# Altium PCB PCB_layer1.PcbDoc
Units mm, origin at the board's own origin, x right, y up, seen from the top; angles counter-clockwise.
Board outline 140.34 x 105.41 mm, 2 copper layers (Top Layer, Bottom Layer); 81 components, 0 nets, 416 pads, 142 vias.
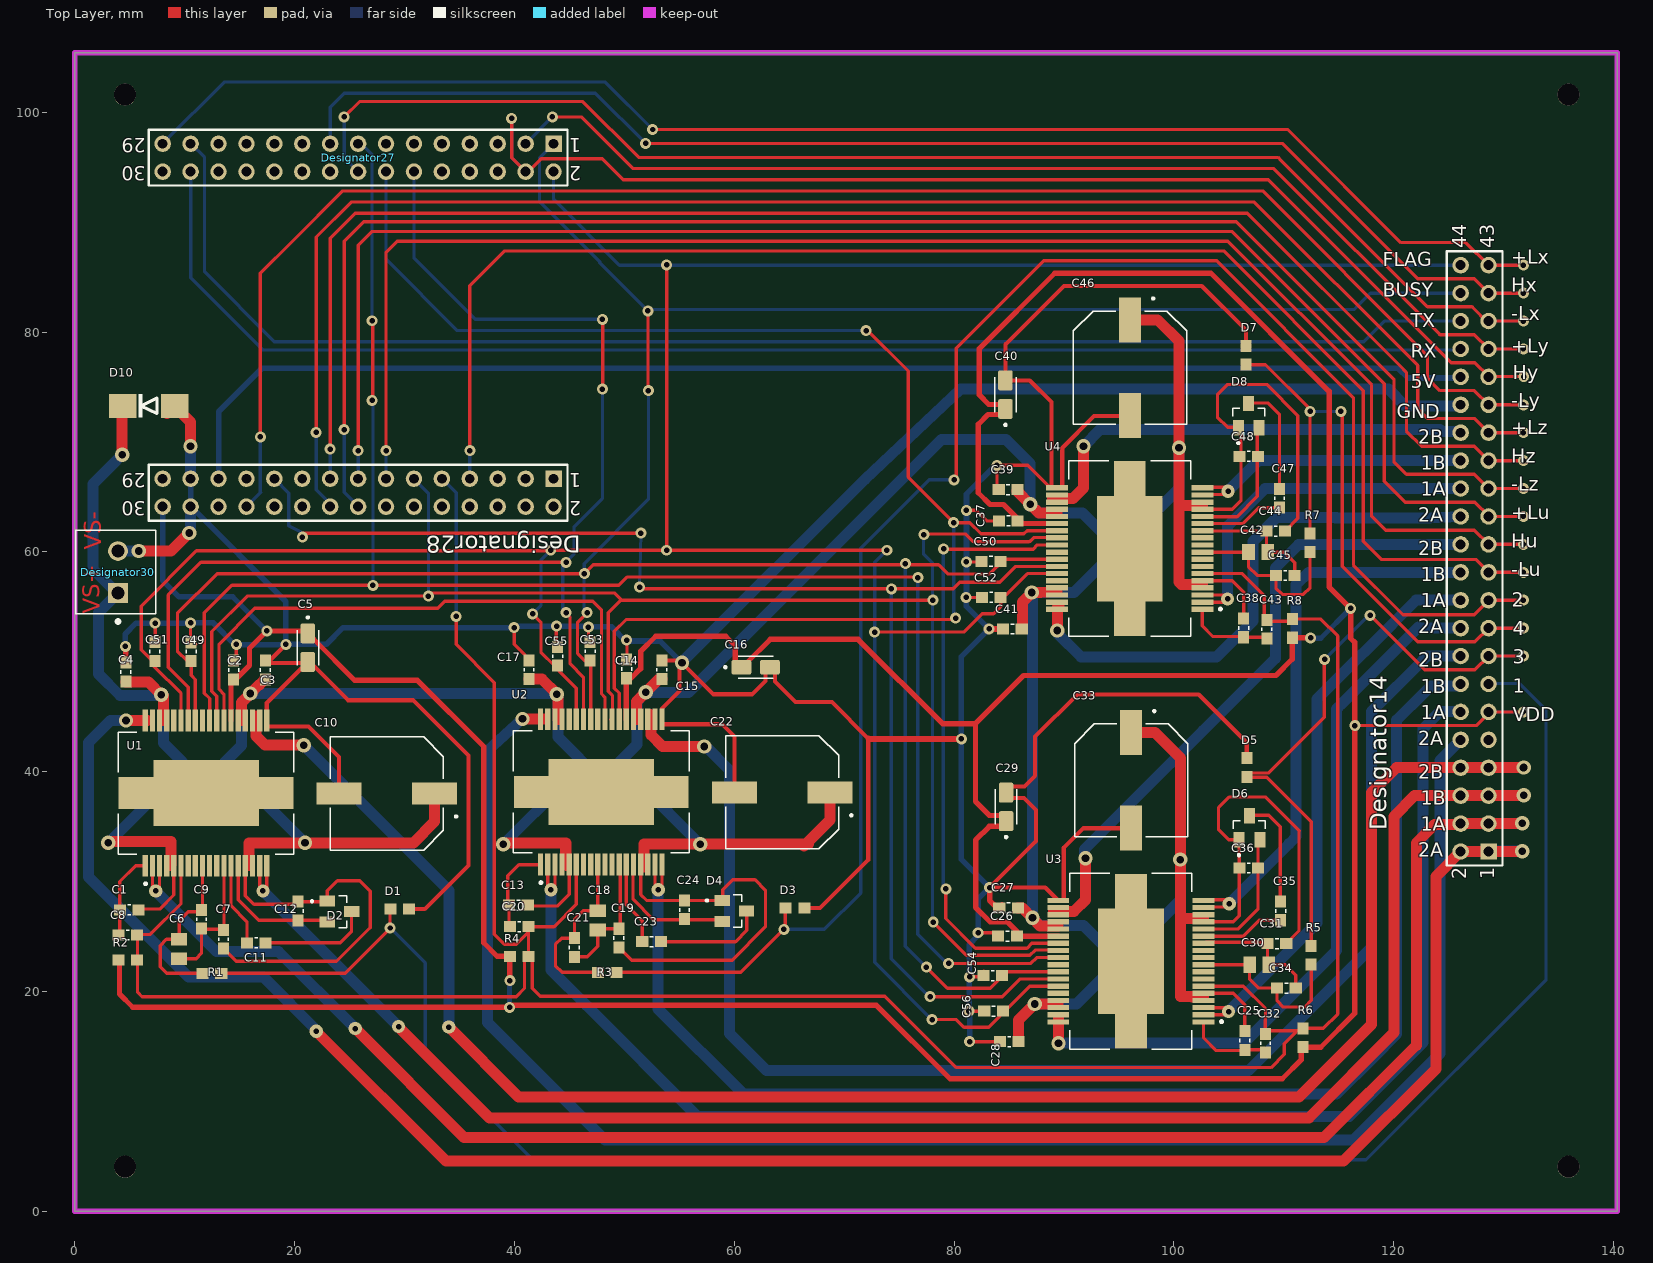
[diagram p0: Top Layer view]
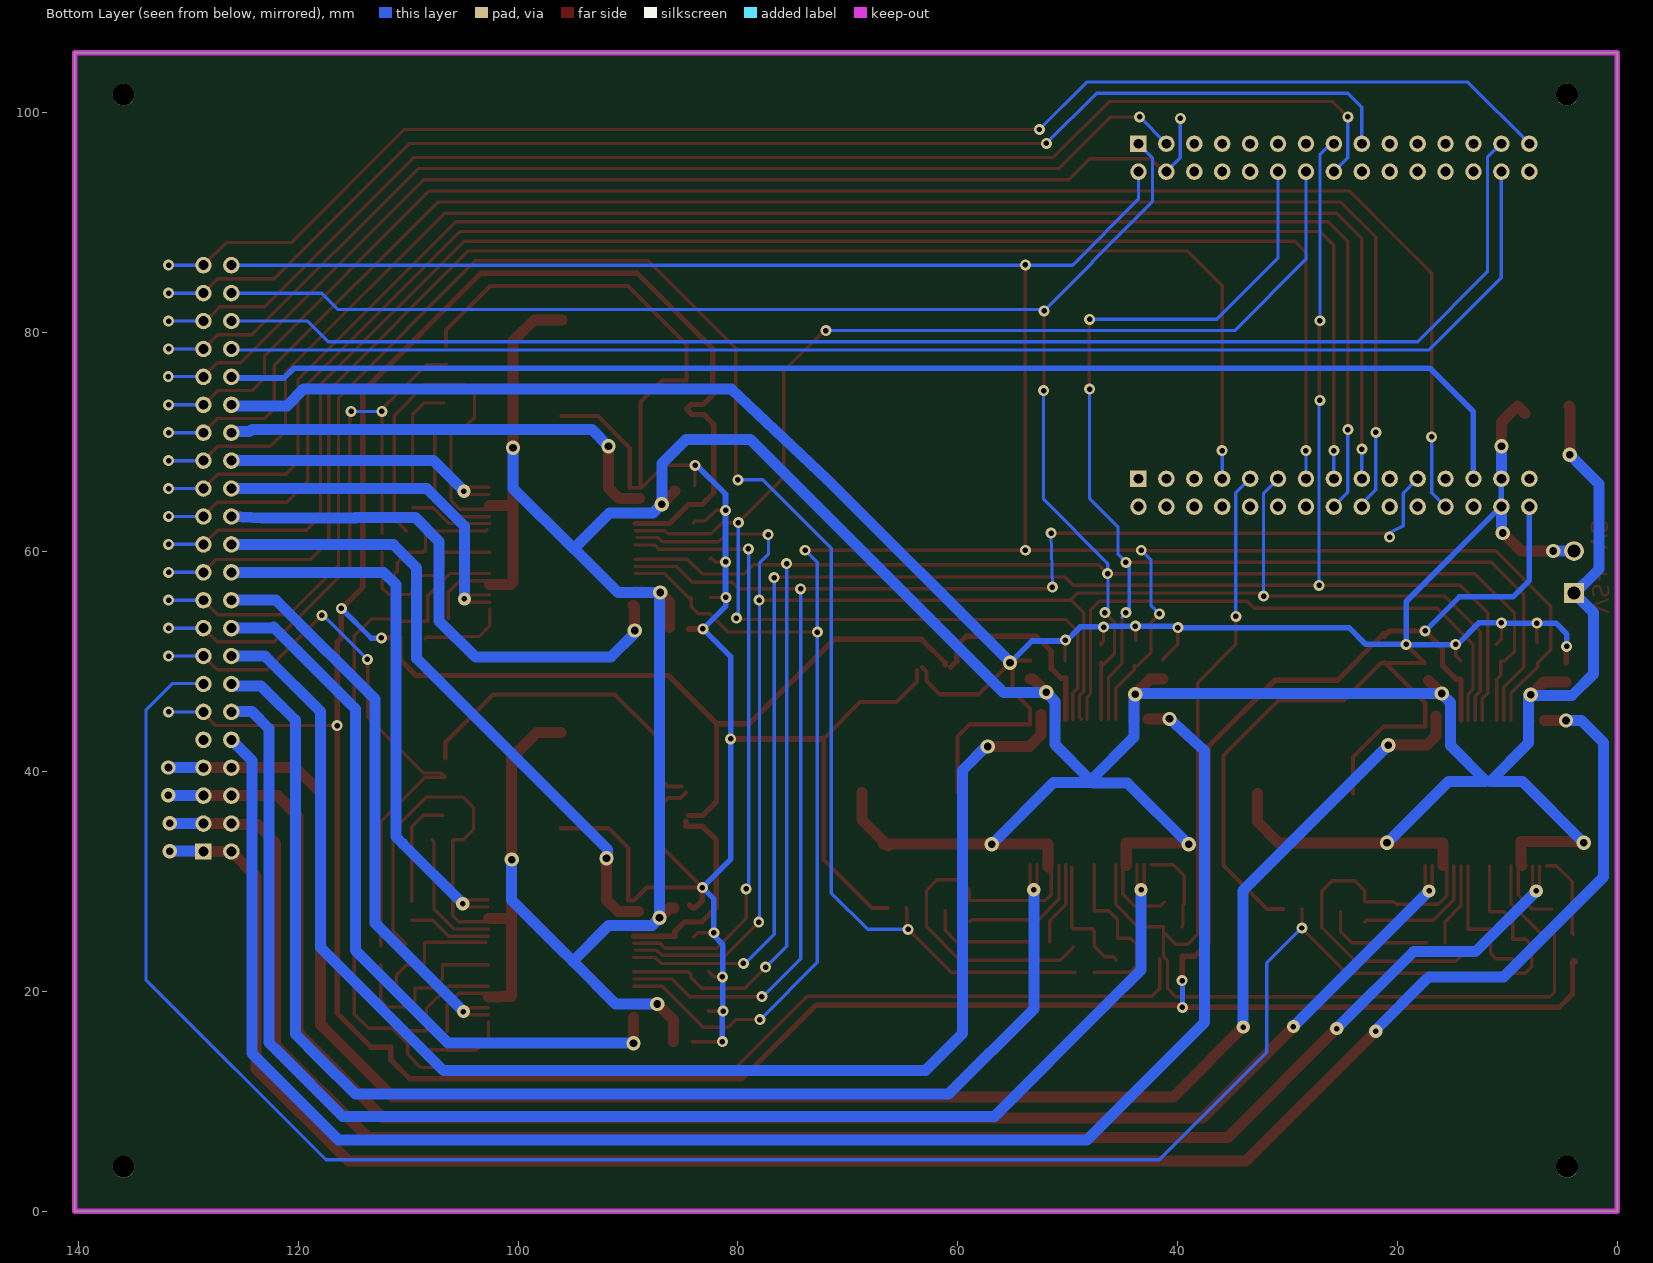
[diagram p1: Bottom Layer view, seen from below]

## Layer stack, top to bottom
Top Solder: solder mask 0.0102, Solder Resist, Dk 3.5
Top Layer: signal copper 0.0356
Dielectric 1: dielectric 0.32, FR-4, Dk 4.8
Bottom Layer: signal copper 0.0356
Bottom Solder: solder mask 0.0102, Solder Resist, Dk 3.5

## Board outline
0,0 140.335,0 140.335,105.41 0,105.41

## Design rules (kind name [scope] priority, off if disabled: settings)
Clearance [All] p1: gap=0.254 ignorepadtopadclearanceinfootprint=FALSE except(0: Arc-Hole Track-Hole SMDPad-Hole THPad-Hole Via-Hole Fill-Hole Poly-Hole Region-Hole Text-Hole)
PolygonConnect [All] p1: connectstyle=Relief reliefconductorwidth=0.254 reliefentries=4 polygonreliefangle="90 Angle" airgapwidth=0.254
RoutingVias [All] p1: holewidth=0.711 width=1.27 viastyle="Through Hole" minholewidth=0.5 minwidth=1 maxholewidth=0.711 maxwidth=1.3
ShortCircuit [All] p1: allowed=TRUE
SolderMaskExpansion [All] p1: expansion=0.102
Width [All] p1: maxlimit=1 minlimit=0.254 preferedwidth=0.254
29 further rules are at their usual default settings.

## Components (designator, comment, footprint, x,y, rotation, side; value= is the part's Value field where it differs from the comment)
C1 "100nF" CAPC1608X90 4.953,27.432 r180 top
C2 "100nF" CAPC1608X90 14.453,49.251 r90 top
C3 "100nF" CAPC1608X90 17.348,49.251 r90 top
C4 "100nF" CAPC1608X90 4.648,49.073 r90 top
C5 "47uF" CAPMP3216X180N 21.209,51.283 r270 top
C6 "10uF" CAPC2012X145N 9.5,23.876 r270 top
C7 "100nF" CAPC1608X90 13.538,24.765 r90 top
C8 "1nF" CAPC1608X90 4.826,25.146 r180 top
C9 "100nF" CAPC1608X90 11.532,26.58 r270 top
C10 "100uF" CAP_EEEFK1J101P 28.397,38.024 r180 top
C11 "10nF" CAPC1608X90 16.522,24.435 r0 top
C12 "220nF" CAPC1608X90 20.32,27.33 r270 top
C13 "100nF" CAPC1608X90 40.361,27.864 r180 top
C14 "100nF" CAPC1608X90 50.212,49.352 r90 top
C15 "100nF" CAPC1608X90 53.416,49.276 r90 top
C16 "47uF" CAPMP3216X180N 61.947,49.505 r0 top
C17 "100nF" CAPC1608X90 41.326,49.276 r90 top
C18 "10uF" CAPC2012X145N 47.585,26.476 r270 top
C19 "100nF" CAPC1608X90 49.501,24.867 r90 top
C20 "1nF" CAPC1608X90 40.437,25.908 r180 top
C21 "100nF" CAPC1608X90 45.463,24.008 r270 top
C22 "100uF" CAP_EEEFK1J101P 64.36,38.125 r180 top
C23 "10nF" CAPC1608X90 52.485,24.536 r0 top
C24 "220nF" CAPC1608X90 55.47,27.432 r270 top
C25 "100nF" CAPC1608X90 106.451,15.545 r270 top
C26 "100nF" CAPC1608X90 84.861,25.039 r180 top
C27 "100nF" CAPC1608X90 84.963,27.606 r180 top
C28 "100nF" CAPC1608X90 85.014,15.443 r180 top
C29 "47uF" CAPMP3216X180N 84.734,36.801 r90 top
C30 "10uF" CAPC2012X145N 107.763,22.439 r0 top
C31 "100nF" CAPC1608X90 109.372,24.355 r180 top
C32 "1nF" CAPC1608X90 108.331,15.291 r270 top
C33 "100uF" CAP_EEEFK1J101P 96.114,39.214 r270 top
C34 "100nF" CAPC1608X90 110.231,20.317 r0 top
C35 "10nF" CAPC1608X90 109.703,27.339 r90 top
C36 "220nF" CAPC1608X90 106.807,31.242 r0 top
C37 "100nF" CAPC1608X90 84.938,62.814 r180 top
C38 "100nF" CAPC1608X90 106.35,53.083 r270 top
C39 "100nF" CAPC1608X90 84.912,65.659 r180 top
C40 "47uF" CAPMP3216X180N 84.672,74.3 r90 top
C41 "100nF" CAPC1608X90 85.305,52.984 r180 top
C42 "10uF" CAPC2012X145N 107.661,59.976 r0 top
C43 "1nF" CAPC1608X90 108.458,52.959 r270 top
C44 "100nF" CAPC1608X90 109.271,61.893 r180 top
C45 "100nF" CAPC1608X90 110.13,57.854 r0 top
C46 "100uF" CAP_EEEFK1J101P 96.012,76.752 r270 top
C47 "10nF" CAPC1608X90 109.601,64.877 r90 top
C48 "220nF" CAPC1608X90 106.807,68.682 r0 top
C49 "100pF" CAPC1608X90 10.592,50.927 r90 top
C50 "100pF" CAPC1608X90 83.363,59.131 r180 top
C51 "100pF" CAPC1608X90 7.29,50.939 r90 top
C52 "100pF" CAPC1608X90 83.388,55.855 r180 top
C53 "100pF" CAPC1608X90 46.888,50.952 r90 top
C54 "100pF" CAPC1608X90 83.515,21.438 r180 top
C55 "100pF" CAPC1608X90 43.942,50.495 r90 top
C56 "100pF" CAPC1608X90 83.591,18.212 r180 top
D1 "GREEN_LED" 0603 29.566,27.508 r180 top
D2 "BAV99" DIO_BAV99 24.087,27.269 r0 top
D3 "GREEN_LED" 0603 65.529,27.61 r180 top
D4 "BAV99" DIO_BAV99 60.011,27.332 r0 top
D5 "GREEN_LED" 0603 106.629,40.383 r270 top
D6 "BAV99" DIO_BAV99 106.868,34.904 r90 top
D7 "GREEN_LED" 0603 106.567,77.881 r270 top
D8 "BAV99" DIO_BAV99 106.805,72.403 r90 top
D10 "SMBJ48A" SMB 6.731,73.279 r0 top
Designator14 "Comment" HDR2X22 128.626,32.741 r90 top
Designator27 "Comment" HDR2X15 43.561,97.13 r180 top
Designator28 "Comment" HDR2X15 43.561,66.65 r180 top
Designator30 "Comment" TE_1776113-2 3.937,58.166 r90 top
R1 "560" 0603 12.483,21.653 r180 top
R2 "39k" 0603 4.826,22.86 r180 top
R3 "560" 0603 48.446,21.754 r180 top
R4 "39k" 0603 40.437,23.19 r180 top
R5 "560" 0603 112.485,23.3 r270 top
R6 "39k" 0603 111.735,15.799 r270 top
R7 "560" 0603 112.383,60.838 r270 top
R8 "39k" 0603 110.769,53.035 r270 top
U1 "L6470PD" SOP65P1420X360-37N 11.947,38.055 r90 top
U2 "L6470PD" SOP65P1420X360-37N 47.91,38.157 r90 top
U3 "L6470PD" SOP65P1420X360-37N 96.082,22.764 r180 top
U4 "L6470PD" SOP65P1420X360-37N 95.981,60.301 r180 top

## Footprints (in the part's own frame and the unit in brackets; to place one, negate y for a bottom-side part, rotate by r counter-clockwise, add the part's x,y. Pads: shape width x height; smd on the part's side, far side on the other; paste and mask are expansions set on the pad)
0603 [mm]
  rect 1.1x1 smd: 1(-0.85,0) 2(0.85,0)
CAP_EEEFK1J101P [mm]
  rect 4.1x2 smd: 1(-4.35,0) 2(4.35,0)
  silkscreen extent -6.4,-5.15 5.15,5.15, body extent -5.85,-5.15 5.85,5.15, height 9.3
CAPC1608X90 [mm]
  rect 1.1x1 smd: 1(-0.85,0) 2(0.85,0)
  silkscreen extent -0.15,-0.45 0.15,0.45, body extent -0.8,-0.4 0.8,0.4, height 0.9
CAPC2012X145N [mm]
  rect 1.15x1.47 smd: 1(-0.88,0) 2(0.88,0)
CAPMP3216X180N [mm]
  rrect25% 1.81x1.32 smd: 1(-1.3,0) 2(1.3,0)
  silkscreen extent -2.85,-0.98 1.6,0.98
DIO_BAV99 [mm]
  rect 1.4x1 smd: 1(-1.1,0.95) 2(-1.1,-0.95) 3(1.1,0)
  silkscreen extent -2.6,-1.46 0.65,1.46, body extent -1.2,-1.46 1.2,1.46, height 1.2
HDR2X15 [mm] "Connector; Header; 15x2 Position"
  rect 1.5x1.5 hole 0.9: 1(0,0)
  round 1.5 hole 0.9: 2(0,2.54) 3(2.54,0) 4(2.54,2.54) 5(5.08,0) 6(5.08,2.54) 7(7.62,0) 8(7.62,2.54) 9(10.16,0) 10(10.16,2.54) 11(12.7,0) 12(12.7,2.54) 13(15.24,0) 14(15.24,2.54) 15(17.78,0) 16(17.78,2.54) 17(20.32,0) 18(20.32,2.54) 19(22.86,0) 20(22.86,2.54) 21(25.4,0) 22(25.4,2.54) 23(27.94,0) 24(27.94,2.54) 25(30.48,0) 26(30.48,2.54) 27(33.02,0) 28(33.02,2.54) 29(35.56,0) 30(35.56,2.54)
  silkscreen extent -1.27,-1.27 36.83,3.81
HDR2X22 [mm] "Connector; Header; 22x2 Position"
  rect 1.5x1.5 hole 0.9: 1(0,0)
  round 1.5 hole 0.9: 2(0,2.54) 3(2.54,0) 4(2.54,2.54) 5(5.08,0) 6(5.08,2.54) 7(7.62,0) 8(7.62,2.54) 9(10.16,0) 10(10.16,2.54) 11(12.7,0) 12(12.7,2.54) 13(15.24,0) 14(15.24,2.54) 15(17.78,0) 16(17.78,2.54) 17(20.32,0) 18(20.32,2.54) 19(22.86,0) 20(22.86,2.54) 21(25.4,0) 22(25.4,2.54) 23(27.94,0) 24(27.94,2.54) 25(30.48,0) 26(30.48,2.54) 27(33.02,0) 28(33.02,2.54) 29(35.56,0) 30(35.56,2.54) 31(38.1,0) 32(38.1,2.54) 33(40.64,0) 34(40.64,2.54) 35(43.18,0) 36(43.18,2.54) 37(45.72,0) 38(45.72,2.54) 39(48.26,0) 40(48.26,2.54) 41(50.8,0) 42(50.8,2.54) 43(53.34,0) 44(53.34,2.54)
  silkscreen extent -1.27,-1.27 54.61,3.81
SMB [mm]
  rect 2.5x2.2 smd: A(2.35,0) C(-2.35,0)
  silkscreen extent -0.9,-1.05 0.75,1.05, body extent -2.65,-1.81 2.65,1.81, height 1.15
SOP65P1420X360-37N [mm]
  rect 1.99x0.48 smd: 1(-6.61,5.525) 2(-6.61,4.875) 3(-6.61,4.225) 4(-6.61,3.575) 5(-6.61,2.925) 6(-6.61,2.275) 7(-6.61,1.625) 8(-6.61,0.975) 9(-6.61,0.325) 10(-6.61,-0.325) 11(-6.61,-0.975) 12(-6.61,-1.625) 13(-6.61,-2.275) 14(-6.61,-2.925) 15(-6.61,-3.575) 16(-6.61,-4.225) 17(-6.61,-4.875) 18(-6.61,-5.525) 19(6.61,-5.525) 20(6.61,-4.875) 21(6.61,-4.225) 22(6.61,-3.575) 23(6.61,-2.925) 24(6.61,-2.275) 25(6.61,-1.625) 26(6.61,-0.975) 27(6.61,-0.325) 28(6.61,0.325) 29(6.61,0.975) 30(6.61,1.625) 31(6.61,2.275) 32(6.61,2.925) 33(6.61,3.575) 34(6.61,4.225) 35(6.61,4.875) 36(6.61,5.525)
  rect 6x9.6 smd paste-6: 37(0,0)
  rect 2.9x3.15 smd paste-3: 37_1(0,6.375) 37_2(0,-6.375)
  silkscreen extent -8.32,-8 5.55,8
TE_1776113-2 [mm]
  rect 1.8x1.8 hole 1.2: 1(-1.905,0)
  round 1.8 hole 1.2: 2(1.905,0)
  silkscreen extent -4.65,-3.45 3.81,3.85, body extent -3.81,0 3.81,7.3, height 4.25

## Part data
C1 C2 C3 C4 C7 C8 C9 C11 C12 C13 C14 C15 C17 C19 C20 C21 C23 C24 C25 C26 C27 C28 C31 C32 C34 C35 C36 C37 C38 C39 C41 C43 C44 C45 C47 C48 C49 C50 C51 C52 C53 C54 C55 C56: library part CC0603JRX7R8BB183, "0603 0.018 uF 25 V A∮5% Tolerance X7R Multilayer Ceramic Capacitor", Package="0603 Yageo", Availability="In Stock", Check_prices=https://www.snapeda.com/parts/CC0603JRX7R8BB183/Yageo/view-part/?ref=eda, MF=Yageo, MP=CC0603JRX7R8BB183, Price=None, Purchase-URL=https://pricing.snapeda.com/search/part/CC0603JRX7R8BB183/?ref=eda, SnapEDA_Link=https://www.snapeda.com/parts/CC0603JRX7R8BB183/Yageo/view-part/?ref=snap
C5 C16 C29 C40: library part TAJA476K006RNJ, "47A£gF Molded Tantalum Capacitors 6.3V 1206 (3216 Metric) 1.6Ohm", Package="1206 AVX", Availability=Unavailable, MF=AVX, MP=TAJA476K006RNJ, Price=None, SnapEDA_Link=https://www.snapeda.com/parts/TAJA476K006RNJ/AVX/view-part/1682889/?ref=snap
C6 C18 C30 C42: library part C2012X5R0J106K125AB, "CERAMIC CAPACITOR, 10UF, 6.3V, X5R, 10%, 0805, FULL REEL", Package=None, Availability=Unavailable, MP=C2012X5R0J106K125AB, Price=None
C10 C22 C33 C46: library part EEEFK1J101P, "100A£gF 63V Aluminum Electrolytic Capacitors Radial, Can - SMD 2000 Hrs @ 105A¢XC", Package="RADIAL-2 Panasonic", Availability="In Stock", Check_prices=https://www.snapeda.com/parts/EEEFK1J101P/Panasonic%20Electronic%20Components/view-part/583660/?ref=eda, MF="Panasonic Electronic", MP=EEEFK1J101P, Price=None, Purchase-URL=https://pricing.snapeda.com/search/part/EEEFK1J101P/?ref=eda, SnapEDA_Link=https://www.snapeda.com/parts/EEEFK1J101P/Panasonic%20Electronic%20Components/view-part/583660/?ref=snap
D1 D3 D5 D7: library part LTST-C193KFKT-5A, "Orange 605nm LED Indication - Discrete 2V 0603 (1608 Metric)", Package="0603 Lite-On", Arrow_Electronics-Purchase-URL=https://snapeda.com/shop?store=Arrow+Electronics&id=641468, Availability=Good, DigiKey-Purchase-URL=https://snapeda.com/shop?store=DigiKey&id=641468, MF="Lite-On Inc.", Mouser-Purchase-URL=https://snapeda.com/shop?store=Mouser&id=641468, MP=LTST-C193KFKT-5A, Price=None, SnapEDA_Link=https://www.snapeda.com/parts/LTST-C193KFKT-5A/Lite-On%20Inc./view-part/641468/?ref=snap
D2 D4 D6 D8: "Diode Array 1 Pair Series Connection Standard 100V 215mA (DC) Surface Mount TO-236-3, SC-59, SOT-23-3", Package="SOT-23-3 Motorola", Availability="In Stock", Check_prices=https://www.snapeda.com/parts/BAV99/Onsemi/view-part/?ref=eda, MF="ON Semiconductor", MP=BAV99, Price=None, Purchase-URL=https://pricing.snapeda.com/search/part/BAV99/?ref=eda, SnapEDA_Link=https://www.snapeda.com/parts/BAV99/Onsemi/view-part/?ref=snap
D10: library part SMBJ58A, "93.6V Clamp 6.5A Ipp Tvs Diode Surface Mount DO-214AA (SMBJ)", Package="DO-214 Littelfuse Inc.", Availability=Good, Check_prices=https://www.snapeda.com/parts/SMBJ58A/Littelfuse%20Inc./view-part/498371/?ref=eda, MF="Littelfuse Inc.", MP=SMBJ58A, Price=None, Purchase-URL=https://pricing.snapeda.com/search/part/SMBJ58A/?ref=eda, SnapEDA_Link=https://www.snapeda.com/parts/SMBJ58A/Littelfuse%20Inc./view-part/498371/?ref=snap
R1 R2 R3 R4 R5 R6 R7 R8: library part RC0603FR-7W1KL, "Fixed Resistor, Metal Glaze/thick Film, 0.2W, 1000ohm, 50V, 1% +/-Tol, 200ppm/Cel, Surface Mount, 0603", Package="0603 Yageo", Availability=Unavailable, MF=Yageo, MP=RC0603FR-7W1KL, Price=None, SnapEDA_Link=https://www.snapeda.com/parts/RC0603FR-7W1KL/Yageo/view-part/1012814/?ref=snap
U1 U2 U3 U4: "Bipolar Motor Driver DMOS SPI PowerSSO-36", Package="BSSOP-36 STMicroelectronics", Digi-Key_Part_Number=497-13416-ND, Digi-Key_Purchase_URL=https://www.digikey.com/product-detail/en/stmicroelectronics/L6470PD/497-13416-ND/3748904?utm_source=snapeda&utm_medium=aggregator&utm_campaign=symbol, MF=STMicroelectronics, MP=L6470PD, SnapEDA_Link=https://www.snapeda.com/parts/L6470PD/STMicroelectronics/view-part/328135/?ref=snap

## Free pads (board coordinates)
  round 2 hole 2 unplated: 5(4.572,4.064) 5(4.572,101.6) 5(135.89,4.064) 5(135.89,101.6)

## Via types
v1: diameter 1, hole 0.5, Top Layer to Bottom Layer, 98 vias
v2: diameter 1.3, hole 0.7, Top Layer to Bottom Layer, 31 vias
v3: diameter 1.2, hole 0.5, Top Layer to Bottom Layer, 12 vias
v4: diameter 1.27, hole 0.711, Top Layer to Bottom Layer, 1 vias

## Nets (pads, with @x,y where several pads share a name; then routed paths per layer and width w, separated by ;. In a path a pad name is that pad's centre, name@x,y a point inside that pad or via, vN(x,y) a via of type N, cw(c..) or ccw(c..) an arc to the next point about the centre after c; other vN are vias at no path point)
pads on no net: C1.1 C1.2 C2.1 C2.2 C3.1 C3.2 C4.1 C4.2 C5.1 C5.2 C6.1 C6.2 C7.1 C7.2 C8.1 C8.2 C9.1 C9.2 C10.1 C10.2 C11.1 C11.2 C12.1 C12.2 C13.1 C13.2 C14.1 C14.2 C15.1 C15.2 C16.1 C16.2 C17.1 C17.2 C18.1 C18.2 C19.1 C19.2 C20.1 C20.2 C21.1 C21.2 C22.1 C22.2 C23.1 C23.2 C24.1 C24.2 C25.1 C25.2 C26.1 C26.2 C27.1 C27.2 C28.1 C28.2 C29.1 C29.2 C30.1 C30.2 C31.1 C31.2 C32.1 C32.2 C33.1 C33.2 C34.1 C34.2 C35.1 C35.2 C36.1 C36.2 C37.1 C37.2 C38.1 C38.2 C39.1 C39.2 C40.1 C40.2 C41.1 C41.2 C42.1 C42.2 C43.1 C43.2 C44.1 C44.2 C45.1 C45.2 C46.1 C46.2 C47.1 C47.2 C48.1 C48.2 C49.1 C49.2 C50.1 C50.2 C51.1 C51.2 C52.1 C52.2 C53.1 C53.2 C54.1 C54.2 C55.1 C55.2 C56.1 C56.2 D1.1 D1.2 D2.1 D2.2 D2.3 D3.1 D3.2 D4.1 D4.2 D4.3 D5.1 D5.2 D6.1 D6.2 D6.3 D7.1 D7.2 D8.1 D8.2 D8.3 D10.A D10.C Designator14.1 Designator14.2 Designator14.3 Designator14.4 Designator14.5 Designator14.6 Designator14.7 Designator14.8 Designator14.9 Designator14.10 Designator14.11 Designator14.12 Designator14.13 Designator14.14 Designator14.15 Designator14.16 Designator14.17 Designator14.18 Designator14.19 Designator14.20 Designator14.21 Designator14.22 Designator14.23 Designator14.24 Designator14.25 Designator14.26 Designator14.27 Designator14.28 Designator14.29 Designator14.30 Designator14.31 Designator14.32 Designator14.33 Designator14.34 Designator14.35 Designator14.36 Designator14.37 Designator14.38 Designator14.39 Designator14.40 Designator14.41 Designator14.42 Designator14.43 Designator14.44 Designator27.1 Designator27.2 Designator27.3 Designator27.4 Designator27.5 Designator27.6 Designator27.7 Designator27.8 Designator27.9 Designator27.10 Designator27.11 Designator27.12 Designator27.13 Designator27.14 Designator27.15 Designator27.16 Designator27.17 Designator27.18 Designator27.19 Designator27.20 Designator27.21 Designator27.22 Designator27.23 Designator27.24 Designator27.25 Designator27.26 Designator27.27 Designator27.28 Designator27.29 Designator27.30 Designator28.1 Designator28.2 Designator28.3 Designator28.4 Designator28.5 Designator28.6 Designator28.7 Designator28.8 Designator28.9 Designator28.10 Designator28.11 Designator28.12 Designator28.13 Designator28.14 Designator28.15 Designator28.16 Designator28.17 Designator28.18 Designator28.19 Designator28.20 Designator28.21 Designator28.22 Designator28.23 Designator28.24 Designator28.25 Designator28.26 Designator28.27 Designator28.28 Designator28.29 Designator28.30 Designator30.1 Designator30.2 R1.1 R1.2 R2.1 R2.2 R3.1 R3.2 R4.1 R4.2 R5.1 R5.2 R6.1 R6.2 R7.1 R7.2 R8.1 R8.2 U1.1 U1.2 U1.3 U1.4 U1.5 U1.6 U1.7 U1.8 U1.9 U1.10 U1.11 U1.12 U1.13 U1.14 U1.15 U1.16 U1.17 U1.18 U1.19 U1.20 U1.21 U1.22 U1.23 U1.24 U1.25 U1.26 U1.27 U1.28 U1.29 U1.30 U1.31 U1.32 U1.33 U1.34 U1.35 U1.36 U1.37 U1.37_1 U1.37_2 U2.1 U2.2 U2.3 U2.4 U2.5 U2.6 U2.7 U2.8 U2.9 U2.10 U2.11 U2.12 U2.13 U2.14 U2.15 U2.16 U2.17 U2.18 U2.19 U2.20 U2.21 U2.22 U2.23 U2.24 U2.25 U2.26 U2.27 U2.28 U2.29 U2.30 U2.31 U2.32 U2.33 U2.34 U2.35 U2.36 U2.37 U2.37_1 U2.37_2 U3.1 U3.2 U3.3 U3.4 U3.5 U3.6 U3.7 U3.8 U3.9 U3.10 U3.11 U3.12 U3.13 U3.14 U3.15 U3.16 U3.17 U3.18 U3.19 U3.20 U3.21 U3.22 U3.23 U3.24 U3.25 U3.26 U3.27 U3.28 U3.29 U3.30 U3.31 U3.32 U3.33 U3.34 U3.35 U3.36 U3.37 U3.37_1 U3.37_2 U4.1 U4.2 U4.3 U4.4 U4.5 U4.6 U4.7 U4.8 U4.9 U4.10 U4.11 U4.12 U4.13 U4.14 U4.15 U4.16 U4.17 U4.18 U4.19 U4.20 U4.21 U4.22 U4.23 U4.24 U4.25 U4.26 U4.27 U4.28 U4.29 U4.30 U4.31 U4.32 U4.33 U4.34 U4.35 U4.36 U4.37 U4.37_1 U4.37_2
copper on no net: | length 7617.9
  Top Layer w0.3: 3.976,25.146 4.103,25.273 4.103,27.432 4.103,28.397 4.103,30.011 5.537,31.445 6.422,31.445 ; 5.93,27.508 7.747,27.508 9.022,28.783 9.022,31.445 ; 7.072,31.445 7.072,29.276 7.188,29.159 v3(7.366,29.159) 7.595,29.159 7.722,29.286 7.722,31.445 ; 7.29,51.789 7.315,51.814 v1(7.315,53.518) ; 9.5,22.996 11.058,22.996 11.532,23.47 11.532,25.73 11.602,25.66 13.572,25.66 13.572,31.445 ; 9.672,31.445 9.672,28.01 6.858,25.197 5.715,25.197 5.715,23.686 5.715,19.939 6.121,19.533 40.157,19.533 40.919,20.295 40.919,22.823 41.287,23.19 41.287,25.437 ; 9.672,44.665 9.672,47.123 7.239,49.555 7.239,49.911 6.045,51.105 6.045,55.067 11.074,60.096 43.256,60.096 v1(43.307,60.147) 73.863,60.147 73.889,60.122 v1(73.889,60.147) ; 10.322,44.665 10.322,47.692 8.509,49.505 8.509,56.083 11.481,59.055 v1(44.704,59.055) v1@44.755,59.106 ; v1(10.541,53.543) 10.541,52.031 10.998,51.574 ; 10.972,44.665 10.972,48.388 10.592,48.768 10.592,50.077 10.223,50.077 9.347,50.952 9.347,54.407 12.954,58.014 v1(46.355,58.014) 47.168,58.826 75.743,58.826 78.588,58.826 79.426,57.988 83.261,57.988 84.599,59.326 89.371,59.326 ; 11.622,31.445 11.622,27.254 10.313,27.254 9.5,26.441 9.5,24.756 8.348,24.756 7.772,24.181 7.772,22.25 8.37,21.653 11.633,21.653 ; 12.272,44.665 12.272,46.66 11.786,47.146 11.786,54.458 14.3,56.972 49.505,56.972 50.241,57.709 v1@76.708,57.709 ; 12.922,44.665 12.922,46.87 12.471,47.32 12.471,52.756 15.697,55.982 v1(32.182,55.982) 32.461,56.261 49.073,56.261 49.708,55.626 48.539,54.458 48.539,47.32 48.92,46.939 48.92,44.911 48.776,44.767 ; 13.333,21.653 24.624,21.653 28.677,25.705 28.677,27.469 28.716,27.508 ; 13.538,23.915 14.695,22.758 23.774,22.758 23.8,22.733 26.848,25.781 26.873,25.781 26.873,29.134 25.933,30.074 23.901,30.074 22.987,29.159 22.987,28.219 22.948,28.18 20.32,28.18 20.08,27.94 16.307,27.94 15.522,28.725 15.522,31.445 15.847,31.445 ; 13.572,44.665 13.572,47.058 13.132,47.498 13.132,51.613 16.383,54.864 33.02,54.864 33.655,55.499 47.117,55.499 47.244,55.372 47.926,54.69 47.926,47.07 48.235,46.761 48.235,44.767 ; 14.222,31.445 14.222,27.79 15.672,26.34 15.672,24.435 ; 14.249,50.101 14.707,50.558 v1(14.707,51.587) ; 14.872,31.445 14.872,28.334 16.725,26.48 20.32,26.48 22.826,26.48 22.987,26.319 ; 16.172,44.665 16.172,44.772 16.485,45.085 ; v3@16.822,29.276 16.822,31.445 ; v1@16.891,70.587 16.891,85.344 19.812,88.265 24.384,92.837 99.568,92.837 108.077,92.837 123.063,77.851 123.063,75.819 124.206,74.676 127.254,74.676 127.33,74.676 128.626,73.381 v1(131.801,73.381) ; 17.372,24.435 24.155,24.435 25.187,25.466 25.187,27.269 ; v3@17.472,29.286 17.472,31.445 ; v1@20.777,61.697 v1(51.511,61.697) ; v1(21.971,70.866) 21.971,88.646 25.146,91.821 99.314,91.821 107.315,91.821 122.174,76.962 122.174,76.2 122.174,73.025 123.063,72.136 127.33,72.136 128.626,70.841 v1(131.801,70.841) ; 23.241,64.11 23.241,64.389 ; v1(23.241,69.342) 23.241,88.519 25.527,90.805 98.298,90.805 106.68,90.805 120.523,76.962 121.158,76.327 121.158,70.993 122.555,69.596 127.254,69.596 127.33,69.596 128.626,68.301 v1(131.801,68.301) ; v1(24.511,71.12) 24.511,82.423 24.511,88.265 26.289,90.043 97.282,90.043 98.298,90.043 105.664,90.043 120.015,75.692 120.015,68.199 121.158,67.056 127.254,67.056 127.33,67.056 128.626,65.761 ; v1(24.511,99.568) 25.908,100.965 46.228,100.965 51.308,95.885 51.816,95.885 109.347,95.885 109.474,95.885 109.728,95.631 123.063,82.296 127.127,82.296 127.254,82.169 128.422,81.001 128.626,81.001 v1(131.801,81.001) ; 25.781,64.11 25.781,64.135 ; v1(25.781,69.215) 25.781,82.296 25.781,86.868 25.781,87.884 27.051,89.154 96.52,89.154 104.394,89.154 105.283,89.154 119.126,75.311 119.126,66.421 121.031,64.516 127.381,64.516 128.626,63.271 128.626,63.221 ; v1@27.102,81.026 27.102,73.812 v1@27.127,73.787 ; v1(28.321,69.215) 28.321,82.677 28.321,87.249 29.337,88.265 95.25,88.265 96.52,88.265 104.902,88.265 117.983,75.184 117.983,63.5 117.983,63.246 119.253,61.976 127.33,61.976 128.626,60.681 ; v1(34.696,54.127) 34.696,51.587 38.176,48.108 38.176,25.222 39.091,24.308 40.157,24.308 41.287,25.437 ; v1(35.941,69.215) 35.941,84.201 39.116,87.376 95.123,87.376 104.521,87.376 117.221,74.676 ; 39.587,25.908 39.511,25.984 39.511,27.864 39.395,27.979 39.395,30.531 40.411,31.547 42.385,31.547 ; v1(39.751,99.441) 39.751,95.86 41.021,94.59 41.25,94.59 42.291,95.631 42.418,95.758 48.006,95.758 49.911,93.853 108.585,93.853 108.966,93.472 125.222,77.216 127.381,77.216 128.626,75.971 128.626,75.921 ; v1(39.98,53.111) 39.98,51.574 41.377,50.177 41.326,50.126 ; 41.211,28.118 41.541,27.788 43.942,27.788 44.985,28.83 44.985,31.547 ; 41.631,23.012 41.631,20.295 42.342,19.583 73.711,19.583 80.213,13.081 108.839,13.081 110.033,14.275 110.033,15.24 111.227,16.434 ; v1(41.656,54.356) 42.418,53.594 42.418,50.876 43.649,49.645 43.942,49.645 43.942,49.276 45.635,47.583 45.635,44.767 ; 43.035,31.547 43.035,29.377 43.151,29.261 v3(43.329,29.261) 43.558,29.261 43.685,29.388 43.685,31.547 ; v1(43.459,99.568) 45.212,99.568 46.101,99.568 50.8,94.869 51.943,94.869 109.093,94.869 124.079,79.883 124.206,79.756 127.127,79.756 127.33,79.756 128.626,78.461 v1(131.801,78.461) ; 43.815,51.955 v1@43.815,53.238 ; v1(43.834,53.238) v1@43.815,53.238 ; 45.06,54.051 45.06,49.809 46.285,48.584 46.285,44.767 ; 45.553,22.862 45.848,23.158 46.627,23.158 47.585,24.115 47.585,25.475 47.705,25.596 47.705,25.717 49.501,25.717 49.625,25.84 49.625,31.311 ; 45.635,31.547 45.635,27.931 43.612,25.908 41.287,25.908 41.287,25.437 ; v1@46.622,54.47 45.745,53.594 45.745,50.749 46.74,49.754 46.935,49.949 46.935,44.767 ; v1(46.736,53.162) 46.736,51.935 46.998,51.673 46.99,51.552 ; 46.987,51.548 46.99,51.552 ; 47.585,31.547 47.585,27.356 46.276,27.356 45.463,26.543 45.463,24.858 44.311,24.858 43.735,24.282 43.735,22.352 44.333,21.754 47.596,21.754 ; v1@48.031,74.803 v1@48.031,81.153 ; 49.296,21.754 60.587,21.754 64.64,25.806 64.64,27.571 64.679,27.61 ; 49.501,24.017 50.658,22.86 59.737,22.86 59.775,22.822 62.836,25.883 62.836,29.235 61.896,30.175 59.864,30.175 58.95,29.261 58.95,28.321 58.911,28.282 55.47,28.282 52.029,28.282 51.485,28.827 51.485,31.547 51.81,31.547 ; 49.535,44.767 49.535,47.16 49.095,47.6 49.095,52.778 50.165,53.848 79.248,53.848 v1@80.391,53.848 ; 49.784,55.601 v1(78.08,55.601) ; 50.185,31.547 50.185,27.892 51.635,26.441 51.635,24.536 ; 50.238,50.075 v1@50.238,51.74 ; 50.796,31.508 50.796,28.396 52.649,26.543 58.75,26.543 58.911,26.382 ; v1@51.359,56.871 51.359,56.744 51.46,56.642 75.159,56.642 79.934,56.642 80.518,57.226 84.15,57.226 85.6,58.676 89.371,58.676 ; v1(51.943,97.155) 109.474,97.155 109.855,97.155 122.174,84.836 127.33,84.836 128.626,83.541 v1(131.801,83.541) ; 52.135,44.767 52.135,44.874 52.448,45.187 ; v1@52.146,74.676 v1(52.146,81.915) ; v1(52.578,98.425) 110.363,98.425 120.65,88.138 126.568,88.138 128.626,86.081 v1(131.801,86.081) ; v3@52.785,29.377 52.785,31.547 ; 53.335,24.536 60.118,24.536 61.15,25.568 61.15,27.371 ; v3@53.435,29.388 53.435,31.547 ; v1(53.848,60.147) v1(53.848,86.106) ; v1@72.072,80.2 75.819,76.454 75.819,66.802 v1(79.959,62.662) 81.432,62.662 82.448,61.646 86.36,61.646 86.641,61.926 89.371,61.926 ; v1(72.771,52.705) 74.625,52.705 80.899,52.705 82.575,54.381 83.591,54.381 84.238,55.028 84.238,55.855 ; v1@77.241,61.62 81.051,61.62 81.763,60.909 86.819,60.909 86.87,60.96 86.895,60.935 87.273,61.312 89.226,61.312 ; v1(77.47,22.225) 79.4,20.295 83.287,20.295 84.264,21.272 84.264,21.514 84.538,21.789 89.472,21.789 ; v1(77.826,19.533) 84.379,19.533 85.985,21.139 89.472,21.139 ; v1(78.003,17.45) 80.188,17.45 80.899,16.739 83.146,16.739 86.896,20.489 89.472,20.489 ; v1(78.105,26.314) 81.128,23.292 86.892,23.292 87.374,23.774 89.328,23.774 ; v1@78.994,29.464 79.248,29.21 79.248,26.645 81.944,23.949 86.639,23.949 87.079,24.389 89.472,24.389 ; v1@79.045,60.249 87.198,60.249 87.576,60.626 89.371,60.626 ; v1(79.502,22.555) 86.995,22.555 87.528,23.089 89.472,23.089 ; v1@80.188,66.548 80.188,78.537 83.058,81.407 88.138,86.487 103.886,86.487 116.332,74.041 116.332,65.024 116.332,59.817 116.332,58.801 120.523,54.61 120.84,54.292 127.317,54.292 128.499,55.474 ; v1(81.102,55.855) 82.538,55.855 ; v1(81.128,59.08) 82.074,59.08 82.481,59.487 82.586,59.382 ; v1(81.128,63.779) 81.991,63.779 82.956,62.814 83.878,62.814 84.062,62.63 ; v1(81.356,18.212) 82.665,18.212 82.716,18.263 ; v1@81.382,21.539 81.585,21.336 82.179,21.336 82.687,21.844 ; v1(81.407,15.443) 84.164,15.443 ; v1(82.194,25.349) 83.652,25.349 84.011,24.99 ; 83.896,66.015 v1(83.896,67.869) 86.69,67.869 88.733,65.826 88.849,65.826 89.371,65.826 89.84,65.826 ; 84.372,55.721 86.678,58.026 89.371,58.026 ; 88.951,64.839 89.264,64.526 89.371,64.526 ; 89.052,27.302 89.365,26.989 89.472,26.989 ; 102.591,54.776 102.591,53.264 103.556,52.299 106.284,52.299 106.35,52.233 108.334,52.233 108.458,52.109 ; 102.591,55.426 104.76,55.426 104.877,55.543 v3(104.877,55.721) 104.877,55.949 104.75,56.076 102.591,56.076 ; 102.591,57.376 105.307,57.376 106.35,56.334 106.35,53.933 ; 102.591,58.026 106.207,58.026 108.229,56.004 108.229,53.679 110.947,53.679 ; 102.591,59.976 106.781,59.976 106.781,58.667 107.594,57.854 109.28,57.854 109.28,56.702 109.855,56.127 111.785,56.127 112.383,56.725 112.383,59.988 ; 102.591,62.576 106.246,62.576 107.696,64.027 109.601,64.027 ; 102.591,64.201 102.591,63.876 105.311,63.876 106.096,64.662 106.096,71.062 105.855,71.303 105.816,71.342 104.877,71.342 103.962,72.256 103.962,74.288 104.902,75.228 108.439,75.228 111.277,72.39 111.277,63.05 110.121,61.893 ; 102.63,63.187 105.741,63.187 107.594,65.041 107.594,71.142 107.755,71.303 ; 102.641,65.227 v3@104.811,65.227 ; 102.641,65.877 v3@104.8,65.877 ; 102.692,17.239 102.692,15.799 103.861,14.63 106.387,14.63 106.451,14.695 108.077,14.695 108.331,14.441 ; 102.692,17.889 104.862,17.889 104.978,18.005 v3(104.978,18.183) 104.978,18.412 104.851,18.539 102.692,18.539 ; 102.692,19.839 105.409,19.839 106.451,18.796 106.451,16.395 ; 102.692,20.489 106.308,20.489 108.331,18.466 108.308,16.434 111.227,16.434 ; 102.692,22.439 106.883,22.439 106.883,21.13 107.696,20.317 109.381,20.317 109.381,19.165 109.957,18.589 111.887,18.589 112.485,19.187 112.485,22.45 ; 102.692,25.039 106.319,25.039 107.769,26.489 109.703,26.489 ; 102.692,25.689 105.804,25.689 107.657,27.542 107.657,31.242 107.657,33.643 107.818,33.804 ; 102.692,26.664 102.692,26.339 105.412,26.339 105.957,26.883 105.957,31.242 105.957,33.765 105.918,33.804 104.978,33.804 104.064,34.718 104.064,36.75 105.004,37.69 108.356,37.69 108.356,37.665 111.404,34.617 111.379,34.591 111.379,25.512 110.222,24.355 ; 102.743,27.689 v3@104.912,27.689 ; 102.743,28.339 v3@104.902,28.339 ; 102.826,62.016 102.95,61.893 108.421,61.893 108.421,60.097 108.541,60.097 108.662,59.976 110.022,59.976 110.98,59.019 110.98,58.24 111.276,57.944 ; 102.928,24.479 108.399,24.479 108.522,24.355 108.522,22.559 108.643,22.559 108.764,22.439 110.124,22.439 111.081,21.481 111.081,20.702 111.377,20.407 ; 106.528,77.07 106.567,77.031 108.331,77.031 112.383,72.979 112.383,61.688 ; 106.766,73.542 108.569,73.542 109.601,72.51 109.601,65.727 ; 106.829,36.043 108.632,36.043 109.664,35.011 109.664,28.228 ; 110.769,53.885 113.374,53.885 114.91,52.349 114.91,17.956 113.602,16.649 111.735,16.649 111.442,16.649 111.227,16.434 ; 112.485,24.15 112.485,35.441 108.433,39.494 106.668,39.494 106.629,39.533 106.975,39.878 108.585,39.878 113.665,44.958 v1@113.665,50.165 ; v1@115.316,72.644 115.316,70.612 115.316,58.674 122.174,51.816 127.381,51.816 128.626,53.061 v1(131.801,53.061) ; v1(116.459,44.196) 119.507,44.196 127.508,44.196 128.626,45.314 128.626,45.441 v1(131.801,45.441) ; 117.094,74.803 117.221,74.676 ; v1(117.856,54.229) 122.809,49.276 127.381,49.276 128.626,50.521 v1(131.801,50.521) ; 128.422,65.761 128.626,65.761 ; 128.499,60.681 128.626,60.681 ; 128.626,55.601 v1(131.801,55.601) ; 128.626,62.84 128.626,63.221 ; 128.651,75.946 v1(131.826,75.946) ; v1(131.801,58.141) 128.626,58.141 127.457,59.309 125.858,59.309 118.872,59.309 117.221,60.96 117.221,73.66 117.221,74.676 ; v1(131.801,60.681) 128.626,60.681 ; v1(131.801,63.221) 128.626,63.221 ; v1(131.801,65.761) 128.626,65.761 ; v1@43.815,53.238 43.815,53.408 43.646,53.238 v1@43.815,53.238 ; 46.99,51.552 46.914,51.628 46.841,51.678 46.912,51.618 46.99,51.552
  Top Layer w0.381: v1(19.202,51.587) 17.532,49.917 17.563,49.886 21.112,49.886 ; 21.209,49.983 21.112,49.886 ; 24.047,38.024 24.047,41.332 21.256,44.123 17.472,44.123 17.472,44.665 17.472,46.245 21.112,49.886 ; 30.416,27.508 31.852,27.508 35.814,31.471 35.814,41.478 30.785,46.507 24.867,46.507 21.488,49.886 21.112,49.886 ; 53.416,50.126 v2@55.03,50.126 ; 60.01,38.125 60.01,43.19 58.877,44.323 54.118,44.323 53.442,44.323 53.435,44.33 53.435,44.767 53.435,45.737 55.03,47.332 v2@55.03,50.126 ; 63.247,49.505 62.84,49.097 62.84,48.26 61.62,47.041 58.115,47.041 v2@55.03,50.126 ; 63.703,49.251 63.703,48.209 65.583,46.33 68.881,46.33 72.183,43.028 72.183,31.979 67.815,27.61 66.379,27.61 ; 84.734,38.101 85.218,37.617 86.36,37.617 87.452,36.525 87.452,33.68 v1(83.236,29.464) 88.297,29.464 89.472,28.289 89.97,28.289 89.97,33.074 91.76,34.864 96.114,34.864 ; 85.115,38.659 86.411,38.659 87.376,39.624 87.376,43.202 91.211,47.037 102.26,47.037 106.629,42.669 106.629,41.233 ; 88.849,65.826 88.849,73.635 86.884,75.6 84.672,75.6 84.672,78.881 89.992,84.201 93.884,84.201 99.819,84.201 102.533,84.201 106.567,80.167 106.567,78.731 ; 89.84,65.826 89.84,69.46 92.742,72.363 96.051,72.363
  Top Layer w0.48: 3.976,22.86 3.81,22.694 4.064,22.694 4.064,19.787 5.283,18.567 v1(39.573,18.567) 39.751,18.745 72.949,18.745 79.629,12.065 109.855,12.065 111.595,13.805 111.595,14.987 ; 14.222,44.665 14.222,48.426 ; 14.249,48.401 14.453,48.401 14.644,48.401 15.9,49.657 15.9,51.232 v1(17.475,52.807) 20.726,52.807 21.209,52.324 ; 21.209,52.583 21.696,52.095 25.481,48.311 31.191,48.311 37.211,42.291 37.211,24.435 38.43,23.216 39.575,23.216 ; 39.587,23.19 v1(39.587,20.992) v1@39.624,20.955 ; 50.185,44.767 50.185,48.528 ; 50.212,48.502 50.607,48.502 51.482,49.378 51.482,50.952 52.854,52.324 55.804,52.324 59.233,52.324 60.096,51.46 60.096,50.055 60.647,49.505 ; 61.138,49.708 61.138,49.911 63.271,52.045 71.272,52.045 78.943,44.374 81.94,44.374 ; 84.48,36.017 83.21,36.017 81.94,37.287 81.94,44.374 ; 84.734,35.501 84.734,35.027 83.21,35.027 81.966,33.782 81.966,27.657 83.287,26.336 84.861,26.336 85.737,25.461 85.737,25.066 ; 85.711,25.039 89.472,25.039 ; 89.371,62.576 86.217,62.576 84.48,64.313 83.261,64.313 82.194,65.38 82.194,71.603 83.083,72.492 84.163,72.492 84.672,73 84.266,73.406 83.16,73.406 82.296,74.27 82.296,78.486 89.154,85.344 103.378,85.344 114.122,74.6 114.122,56.82 v1(116.078,54.864) 116.078,52.146 116.459,51.765 116.459,18.034 113.362,14.937 111.723,14.937 ; 111.684,14.898 111.723,14.937 ; 111.735,14.949 111.723,14.937 ; v1(112.446,52.172) 112.432,52.185 110.769,52.185 110.769,50.241 109.271,48.743 86.309,48.743 81.94,44.374
  Top Layer w0.508: 4.648,49.923 v1@4.648,51.333 ; 72.183,43.028 72.234,42.977 v1(80.67,42.977) ; v1(83.185,52.984) 84.455,52.984 ; v1(83.236,29.464) 83.236,28.296 83.925,27.606 84.113,27.606 84.379,27.872
  Top Layer w1: v2@2.921,33.401 3.048,33.401 3.302,33.655 8.763,33.655 8.763,31.572 8.661,31.471 8.687,31.445 ; v2(4.318,68.834) 4.318,70.993 4.318,73.152 4.381,73.215 4.381,73.279 ; 4.648,48.147 6.706,48.147 7.938,46.914 8.077,46.914 8.077,44.696 8.047,44.665 ; v2(4.662,44.665) 6.422,44.665 6.625,44.665 ; v2(5.817,60.071) 8.763,60.071 v2(10.414,61.722) ; 8.382,72.58 9.081,73.279 10.541,71.819 10.541,71.247 v2(10.541,69.596) ; 10.541,66.675 10.566,66.65 ; 15.164,44.665 15.164,46.304 v2(15.977,47.117) 16.789,47.93 16.789,47.904 17.196,48.311 ; 15.847,31.445 15.847,33.528 30.81,33.528 32.747,35.465 32.747,38.024 ; 16.485,45.085 16.485,43.231 17.297,42.418 v2(20.828,42.418) ; v3(21.971,16.383) 33.782,4.572 115.443,4.572 123.825,12.954 123.825,30.226 123.825,30.48 126.086,32.741 128.676,32.741 ; v3(25.527,16.637) 35.433,6.731 37.465,6.731 113.665,6.731 122.047,15.113 122.047,33.274 122.047,33.528 123.698,35.179 125.984,35.179 126.086,35.281 128.626,35.281 v2@131.572,35.306 ; v3(29.464,16.811) 29.464,16.764 30.734,15.494 35.687,10.541 37.719,8.509 112.268,8.509 120.015,16.256 120.015,35.941 121.895,37.821 126.086,37.821 128.626,37.821 v2@131.699,37.821 ; v3(34.036,16.764) 40.386,10.414 111.379,10.414 117.983,17.018 117.983,37.211 117.983,38.1 120.269,40.386 120.294,40.361 126.086,40.361 128.295,40.361 ; v2@39.243,33.528 44.704,33.528 44.704,31.445 ; v2(40.733,44.804) 42.696,44.804 ; 41.326,48.426 42.491,48.426 v2(43.866,47.051) 43.967,46.949 43.967,44.809 44.01,44.767 ; 44.65,31.547 44.65,33.249 ; 51.127,44.767 51.127,46.406 v2(51.94,47.219) 53.147,48.426 53.416,48.426 ; 51.788,31.318 51.788,33.401 66.751,33.401 ; 51.81,31.547 51.81,33.246 51.813,33.249 ; 52.448,45.187 52.448,43.332 53.489,42.291 v2(57.277,42.291) ; 66.341,33.249 68.71,35.617 68.71,38.125 ; 85.711,65.539 v2(86.919,64.331) 87.732,63.519 89.371,63.519 ; 85.813,27.606 86.208,27.606 87.103,26.711 v2(87.129,26.711) 87.129,26.685 87.833,25.981 89.472,25.981 ; 85.864,15.443 85.864,17.396 v2(87.332,18.864) 89.472,18.864 ; 86.208,53.137 86.208,55.43 v2(87.078,56.3) 87.843,56.3 89.349,56.4 89.371,56.401 ; 88.951,64.839 90.805,64.839 91.77,65.805 v2(91.77,69.596) ; 89.052,27.302 90.907,27.302 91.948,28.343 v2(91.948,32.131) ; v2(89.396,52.839) 89.396,54.979 89.56,55.143 ; v2(89.498,15.301) 89.498,17.628 ; 96.012,81.102 98.527,81.102 100.457,79.172 100.457,64.201 ; 96.114,43.564 98.266,43.564 100.584,41.246 v2(100.584,32.004) 100.584,19.558 101.6,19.558 101.654,19.504 102.692,19.504 ; 100.813,26.746 100.895,26.664 102.692,26.664 ; 102.591,57.042 100.667,57.042 100.457,57.252 100.457,64.201 ; 102.591,64.201 100.457,64.201 ; 125.984,42.799 126.086,42.901 ; 125.984,45.339 126.086,45.441 ; 128.626,32.741 131.674,32.741 v2(131.699,32.766) ; 130.175,37.821 131.801,37.821 v2(131.826,37.846) ; v4@131.699,40.361 128.626,40.361 v4(131.801,40.361)
  Bottom Layer w0.3: 8.001,97.13 8.001,97.155 13.589,102.743 48.26,102.743 v1(52.578,98.425) ; 10.566,94.59 10.566,84.938 17.145,78.359 60.579,78.359 71.933,78.359 112.649,78.359 112.903,78.359 124.206,78.359 125.679,78.359 125.832,78.207 ; 10.566,97.13 11.811,95.885 11.811,85.471 18.161,79.121 117.272,79.121 119.151,81.001 123.977,81.001 126.086,81.001 ; 15.621,64.11 16.916,65.405 ; v1@16.764,70.333 17.018,70.587 v1(16.891,70.46) 16.891,65.43 ; 18.186,66.65 19.482,65.354 19.482,62.357 v1@20.777,61.697 ; v1(21.971,70.866) 21.971,65.659 23.241,64.389 23.241,64.11 ; 23.241,66.65 23.241,68.438 v1(23.241,69.342) ; 23.241,97.13 23.241,100.457 24.511,101.727 47.371,101.727 v1(51.943,97.155) ; v1(24.511,71.12) 24.511,65.405 25.781,64.135 ; v1(24.511,99.568) 24.511,95.86 25.781,94.59 ; 25.781,66.65 25.781,68.199 v1(25.781,69.215) ; 25.781,97.13 26.06,97.13 27.051,96.139 27.051,82.55 v1(27.051,81.026) ; v1@27.127,73.787 v1(27.127,56.947) v1@27.153,56.921 ; 28.321,66.65 28.321,68.199 v1(28.321,69.215) ; 28.321,94.59 28.321,86.614 34.798,80.137 51.943,80.137 ; v1(28.702,25.781) 29.187,25.296 31.877,22.606 31.877,21.082 31.877,17.653 31.877,14.478 41.656,4.699 113.284,4.699 117.475,4.699 133.858,21.082 133.858,38.735 133.858,45.593 131.42,48.031 128.626,48.031 ; 30.861,66.65 32.182,65.329 v1(32.182,55.982) ; 30.861,94.59 30.861,86.741 36.449,81.153 v1(48.006,81.153) ; 33.426,66.65 34.696,65.38 v1(34.696,54.127) ; 35.941,66.65 35.941,68.199 v1(35.941,69.215) ; v1(39.751,99.441) 39.751,95.86 41.021,94.59 ; 41.021,97.282 41.021,97.13 v1(43.459,99.568) ; v1(41.656,54.356) 42.418,55.118 42.418,59.258 v1(43.307,60.147) ; 43.561,94.59 43.561,93.713 43.561,92.075 49.555,86.081 54.97,86.081 58.445,86.081 59.588,86.081 116.738,86.081 126.086,86.081 ; 43.561,97.13 42.291,95.86 42.291,91.872 42.342,91.821 44.12,90.043 47.752,86.411 47.752,86.309 v1(52.146,81.915) 52.324,81.915 52.197,82.042 55.677,82.042 116.383,82.042 116.757,82.417 117.507,83.166 117.881,83.541 123.927,83.541 126.086,83.541 ; 45.06,54.051 45.034,54.051 44.399,54.686 44.399,58.75 45.415,59.766 45.415,62.255 48.006,64.846 v1(48.006,74.803) ; v1(46.609,54.483) 46.33,54.762 46.33,57.76 46.355,57.785 46.355,58.928 52.197,64.77 v1(52.197,74.676) ; v1(51.384,56.794) v1(51.511,61.697) ; v1(64.516,25.654) 68.199,25.654 71.501,28.956 71.501,60.325 77.724,66.548 v1(80.01,66.548) ; v1@73.863,60.147 72.771,59.055 72.771,52.832 72.771,22.657 77.978,17.45 v1(78.003,17.45) ; v1@74.473,56.82 v1(74.295,56.642) 74.295,22.987 77.749,19.533 v1(77.826,19.533) ; v1@75.819,58.826 75.565,58.572 75.565,24.13 v1(77.47,22.225) ; v1(76.708,57.658) 76.708,57.175 76.708,25.197 79.35,22.555 v1(79.502,22.555) ; v1@77.292,61.62 77.216,61.544 77.216,59.817 78.029,59.004 v1@78.029,26.314 ; v1@79.024,29.464 79.024,60.092 78.943,60.173 v1(79.045,60.274) ; v1(79.959,62.662) 79.959,54.28 v1@80.391,53.848 ; v1(112.395,72.771) v1(115.189,72.771) ; v1@112.522,72.898 v1@112.598,72.822 ; v1(113.716,50.216) 117.856,54.356 v1(117.856,54.229) ; 128.626,45.441 v1(131.801,45.441) ; 128.626,50.521 v1(131.801,50.521) ; 128.626,53.061 v1(131.801,53.061) ; 128.626,55.601 v1(131.801,55.601) ; 128.626,58.141 v1(131.801,58.141) ; 128.626,60.681 v1(131.801,60.681) ; 128.626,63.221 v1(131.801,63.221) ; 128.626,65.761 v1(131.801,65.761) ; 128.626,68.301 v1(131.801,68.301) ; 128.626,70.841 v1(131.801,70.841) ; 128.626,73.381 v1(131.801,73.381) ; 128.626,78.461 v1(131.801,78.461) ; 128.626,81.001 v1(131.801,81.001) ; 128.626,83.541 v1(131.801,83.541) ; 128.626,86.081 v1(131.801,86.081) ; 128.651,75.946 v1(131.826,75.946) ; 51.943,80.137 v1(72.009,80.137) ; 51.943,80.137 v1(72.009,80.137) ; 51.943,80.137 v1(72.009,80.137)
  Bottom Layer w0.48: 7.899,66.777 8.026,66.65 ; 8.001,64.11 8.001,57.404 9.5,55.905 14.376,55.905 v1(17.475,52.807) ; v1@39.548,20.955 39.548,18.593 v1(39.573,18.567) ; v1(112.446,52.172) 112.471,52.146 113.36,52.146 v1(116.078,54.864)
  Bottom Layer w0.508: v1(4.597,51.41) 4.597,52.527 5.588,53.518 v1(7.315,53.518) 10.516,53.518 v1(10.541,53.543) 12.598,53.543 14.554,51.587 v1(14.707,51.587) v1@14.681,51.562 ; 10.566,66.65 10.566,64.11 19.202,55.474 v1@19.202,51.726 ; 13.106,66.65 13.106,72.771 17.043,76.708 67.564,76.708 114.554,76.708 ; v1@14.529,51.562 v1@14.681,51.562 ; v1(46.736,53.162) v1@46.812,53.162 ; v1@50.165,51.892 v1@50.216,51.892 ; v1(50.216,51.968) v1@50.216,51.892 ; v2@55.03,50.126 53.264,51.892 v1@50.343,51.892 ; v1(81.102,55.855) 81.102,55.067 v1(83.185,52.984) 80.67,50.47 v1(80.67,42.977) 80.67,32.029 v1(83.236,29.464) 82.194,28.423 v1(82.194,25.349) 82.194,25.095 81.382,24.282 81.382,21.539 v1@81.382,18.212 ; v1@81.128,55.88 v1(81.128,59.08) v1(81.128,63.779) 81.128,65.253 83.744,67.869 v1(83.896,67.869) ; v1(81.356,18.212) 81.331,18.186 81.407,18.11 v1(81.407,15.443) ; 125.984,73.279 126.086,73.381 ; 126.086,75.921 125.984,75.819 124.079,75.819 121.285,75.819 120.396,76.708 ; v1@14.681,51.562 19.038,51.562 v1@19.202,51.726 ; v1@19.202,51.726 v1(19.202,51.587) 22.885,51.587 24.409,53.111 v1(39.98,53.111) 40.107,53.238 v1(43.834,53.238) 46.888,53.238 46.838,53.188 48.844,53.188 v1@50.216,51.816 ; v1@50.216,51.816 50.241,51.791 v1@50.343,51.892 ; v1@50.216,51.816 v1@50.216,51.892 ; v1@50.216,51.892 v1@50.343,51.892 ; 114.554,76.708 120.396,76.708 ; 114.554,76.708 120.396,76.708 ; 114.554,76.708 120.396,76.708
  Bottom Layer w1: v2(3.048,33.528) 8.636,39.116 9.512,39.116 11.557,39.116 8.077,42.596 8.077,46.914 4.14,46.914 2.159,48.895 2.159,54.483 3.937,56.261 ; 3.873,56.197 1.651,58.42 1.651,66.167 3.302,67.818 v2(4.318,68.834) ; 3.937,60.071 v2(5.817,60.071) ; v2(4.662,44.665) 3.263,44.665 1.27,42.672 1.27,30.429 10.363,21.336 12.954,21.336 17.145,21.336 17.399,21.082 21.971,16.51 v3(21.971,16.383) ; v3(7.366,29.159) 12.878,23.647 18.517,23.647 v3(25.527,16.637) ; v2@10.541,61.722 10.541,64.11 ; 10.541,66.675 v2(10.541,69.596) ; v3(17.116,29.159) 21.49,24.785 v3(29.464,16.811) ; v2(20.955,33.528) 15.357,39.126 11.989,39.126 11.969,39.147 15.189,42.367 15.189,46.304 15.799,46.914 15.799,47.117 v2(15.977,47.117) 43.8,47.117 v2(43.866,47.051) 43.967,46.949 43.967,43.151 47.901,39.218 ; v2@20.98,42.266 34.036,29.21 v3(34.036,16.764) ; v2(38.989,33.401) 44.577,38.989 47.672,38.989 47.901,39.218 ; v2(40.733,44.804) 37.541,41.893 37.541,17.196 48.26,6.477 106.934,6.477 116.332,6.477 124.206,14.351 124.206,29.083 124.206,30.861 124.206,40.894 124.206,41.021 126.086,42.901 ; v3(43.329,29.261) 43.329,21.971 46.58,18.72 56.664,8.636 ; 47.93,38.999 51.298,38.999 v2(56.896,33.401) ; 47.952,39.218 47.901,39.218 ; v3(53.079,29.261) 53.079,22.602 53.079,18.422 60.833,10.668 107.188,10.668 114.808,10.668 118.11,13.97 120.269,16.129 120.269,44.704 122.736,47.171 123.38,47.816 125.92,47.816 126.086,47.981 ; v2@55.22,49.936 71.874,66.591 80.594,74.803 113.284,74.803 117.983,74.803 119.507,74.803 121.031,73.279 125.984,73.279 ; 56.769,8.636 56.664,8.636 ; v2@57.328,42.367 59.563,40.132 59.563,16.202 62.938,12.827 106.807,12.827 117.983,24.003 117.983,45.466 122.682,50.165 123.038,50.521 123.959,50.521 ; v2@87.3,18.832 v2(87.332,18.864) 91.13,18.864 95.021,22.755 ; v2(89.396,52.839) 89.396,52.59 91.567,50.419 103.886,50.419 107.188,53.721 107.188,60.96 109.347,63.119 114.808,63.119 ; v2(89.498,15.301) 106.36,15.301 114.808,23.749 114.808,45.72 115.316,46.228 ; v2(91.77,69.596) 93.294,71.12 124.228,71.12 124.413,70.935 125.991,70.935 126.086,70.841 ; v2@91.872,32.131 91.872,32.944 99.695,40.767 102.668,43.74 109.22,50.292 109.22,58.547 111.354,60.681 125.734,60.681 125.836,60.579 ; 94.92,60.344 94.92,60.293 ; 94.969,60.294 100.457,65.783 v2(100.457,69.469) ; 95.021,22.806 95.021,22.755 ; v2(100.584,32.004) 100.584,28.318 96.266,24 95.021,22.755 ; v3(104.877,55.721) 104.877,62.332 108.306,65.761 126.086,65.761 ; v3(104.927,65.522) 107.706,68.301 108.235,68.301 110.114,68.301 114.402,68.301 126.086,68.301 ; v3(104.978,18.183) 106.934,20.139 113.03,26.235 113.03,35.179 113.03,46.609 116.713,50.292 117.729,51.308 122.022,55.601 126.086,55.601 ; v3(105.029,27.984) 110.49,33.445 110.49,33.448 111.125,34.083 111.125,35.56 111.125,57.023 112.243,58.141 126.086,58.141 ; 114.681,63.094 123.292,63.094 126.086,63.221 ; 115.189,46.101 122.237,53.149 ; 122.301,53.086 126.06,53.086 126.086,53.061 ; 123.8,50.521 126.086,50.521 ; 124.333,45.466 124.206,45.466 ; 126.086,45.441 126.06,45.466 124.206,45.466 ; 126.086,60.681 125.984,60.579 ; 128.626,32.741 128.651,32.766 130.429,32.766 v2(131.699,32.766) ; 128.626,35.281 130.143,35.281 131.801,35.281 131.826,35.306 v2(131.699,35.306) ; 128.626,37.821 130.023,37.821 131.801,37.821 v2(131.826,37.846) ; 128.753,40.361 128.626,40.361 v4(131.801,40.361) v2(131.826,40.386) ; 47.901,39.218 51.152,42.469 51.152,46.406 51.762,47.015 51.762,47.219 v2(51.94,47.219) 55.855,47.219 78.867,70.231 84.709,70.231 86.919,68.021 v2(86.919,64.331) 86.919,64.154 87.122,64.154 87.732,63.544 91.669,63.544 94.92,60.293 ; 56.664,8.636 106.172,8.636 115.951,8.636 121.666,14.351 122.682,15.367 122.682,43.942 124.206,45.466 ; 94.92,60.293 90.927,56.3 v2(87.078,56.3) 87.129,56.249 v2(87.129,26.711) 87.115,26.711 87.02,26.616 87.224,26.616 87.833,26.006 91.77,26.006 95.021,22.755 ; 125.836,60.579 125.984,60.579 ; 125.836,60.579 125.984,60.579
  other v1: 81.407,21.336 79.248,29.337 80.137,53.975 44.704,54.483 75.565,58.928 20.701,61.341 77.241,61.57 27.051,73.787
  other v2: 7.862,46.99 55.245,49.911

## Keep-outs
Keep-Out Layer:
  the board outline again, w0.5

## Other copper
Top Layer:
  text "VS-" at 2.413,60.198 h1.52 r90
  text "VS+" at 2.286,54.356 h1.52 r90

## Silkscreen, mask and mechanical layers (free items; w line width, h text height)
Top Overlay:
  lines w0.102: 44.831,62.865 44.831,67.945
  text "+Lx" at 130.683,86.233 h1.27
  text "FLAG" at 118.999,85.979 h1.27
  text "Hx" at 130.683,83.647 h1.27
  text "BUSY" at 118.999,83.21 h1.27
  text "-Lx" at 130.683,81.061 h1.27
  text "TX" at 121.539,80.442 h1.27
  text "+Ly" at 130.683,78.105 h1.27
  text "RX" at 121.539,77.673 h1.27
  text "Hy" at 130.81,75.692 h1.27
  text "5V" at 121.539,74.905 h1.27
  text "-Ly" at 130.683,73.152 h1.27
  text "GND" at 120.269,72.136 h1.27
  text "+Lz" at 130.683,70.716 h1.27
  text "2B" at 122.247,69.85 h1.27
  text "Hz" at 130.683,68.13 h1.27
  text "1B" at 122.459,67.479 h1.27
  text "-Lz" at 130.683,65.544 h1.27
  text "1A" at 122.459,65.109 h1.27
  text "+Lu" at 130.683,62.957 h1.27
  text "2A" at 122.247,62.738 h1.27
  text "Hu" at 130.683,60.371 h1.27
  text "2B" at 122.247,59.69 h1.27
  text "-Lu" at 130.683,57.785 h1.27
  text "1B" at 122.459,57.319 h1.27
  text "2" at 130.756,54.991 h1.27
  text "1A" at 122.459,54.949 h1.27
  text "2A" at 122.247,52.578 h1.27
  text "4" at 130.81,52.428 h1.27
  text "3" at 130.81,49.811 h1.27
  text "2B" at 122.247,49.53 h1.27
  text "1" at 130.81,47.194 h1.27
  text "1B" at 122.459,47.159 h1.27
  text "1A" at 122.459,44.789 h1.27
  text "VDD" at 130.81,44.577 h1.27
  text "2A" at 122.247,42.418 h1.27
  text "2B" at 122.247,39.37 h1.27
  text "1B" at 122.459,36.999 h1.27
  text "1A" at 122.459,34.629 h1.27
  text "2A" at 122.247,32.258 h1.27

## Text inside footprints (layer, text, board x,y; h text height)
Designator14: Top Overlay "2" at 126.594,30.201 h1.27 r90; Top Overlay "1" at 129.134,30.201 h1.27 r90; Top Overlay "44" at 126.594,87.605 h1.27 r90; Top Overlay "43" at 129.134,87.605 h1.27 r90
Designator27: Top Overlay "1" at 46.101,97.638 h1.27 r180; Top Overlay "2" at 46.101,95.098 h1.27 r180; Top Overlay "29" at 6.477,97.638 h1.27 r180; Top Overlay "30" at 6.477,95.098 h1.27 r180
Designator28: Top Overlay "1" at 46.101,67.158 h1.27 r180; Top Overlay "2" at 46.101,64.618 h1.27 r180; Top Overlay "29" at 6.477,67.158 h1.27 r180; Top Overlay "30" at 6.477,64.618 h1.27 r180